# Altium PCB Lab1_PowerSupply.PcbDoc
Units mil, origin at the board's own origin, x right, y up, seen from the top; angles counter-clockwise.
Board outline 1150 x 1000 mil, 4 copper layers (Component Side, Ground Plane, Power Plane, Solder Side), stack 61.634 mil thick; 36 components, 23 nets, 106 pads, 171 vias.
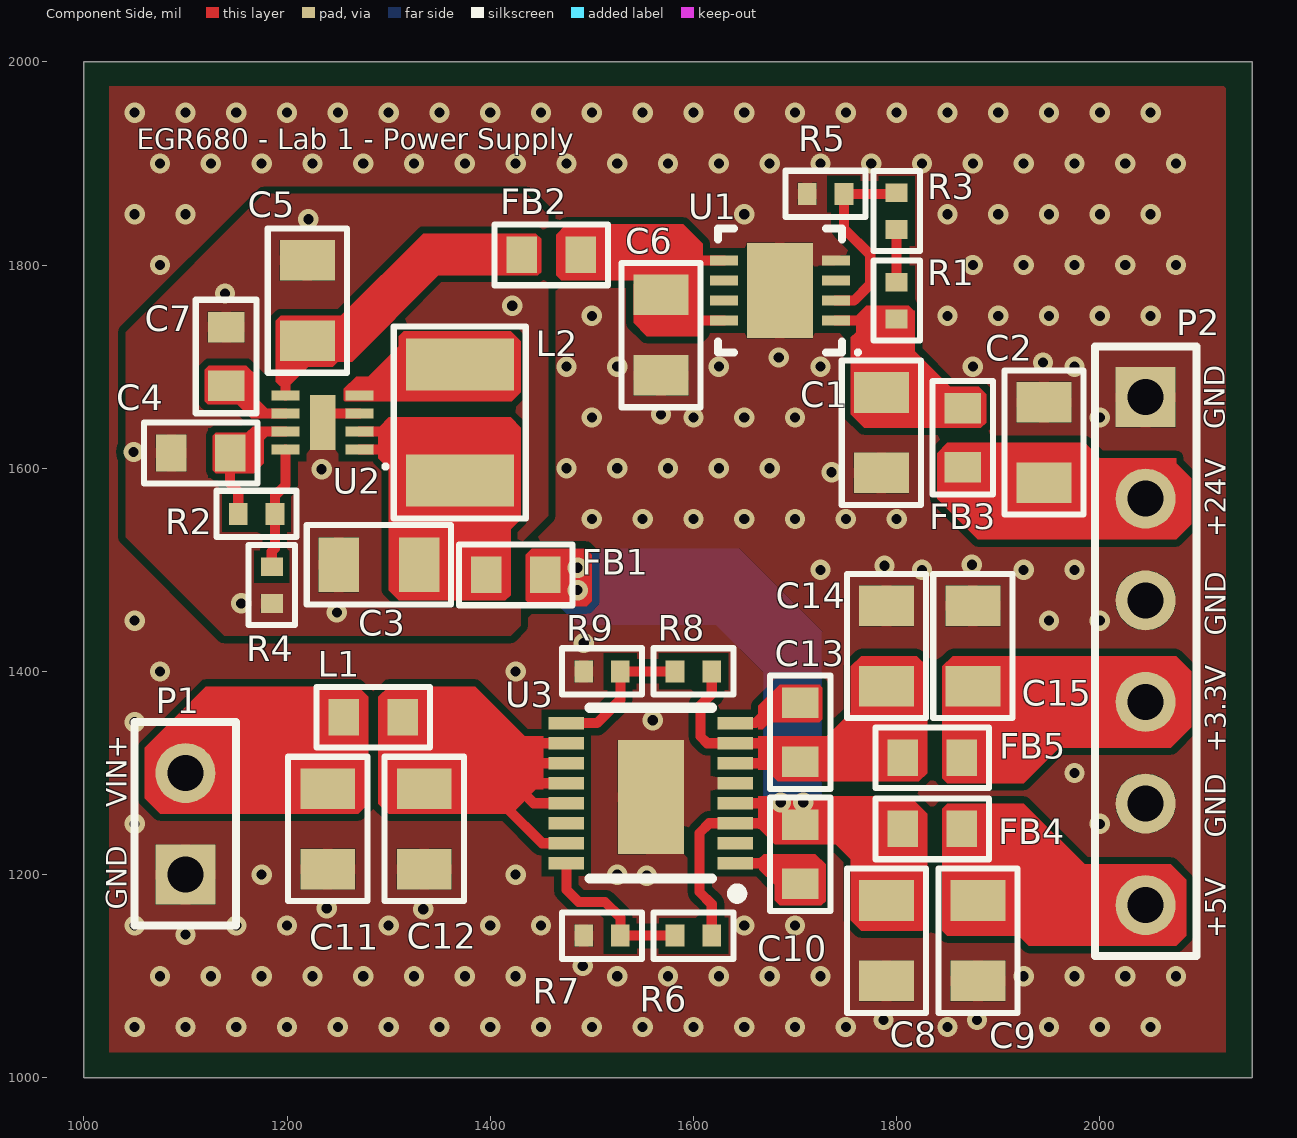
[diagram p0: Component Side view]
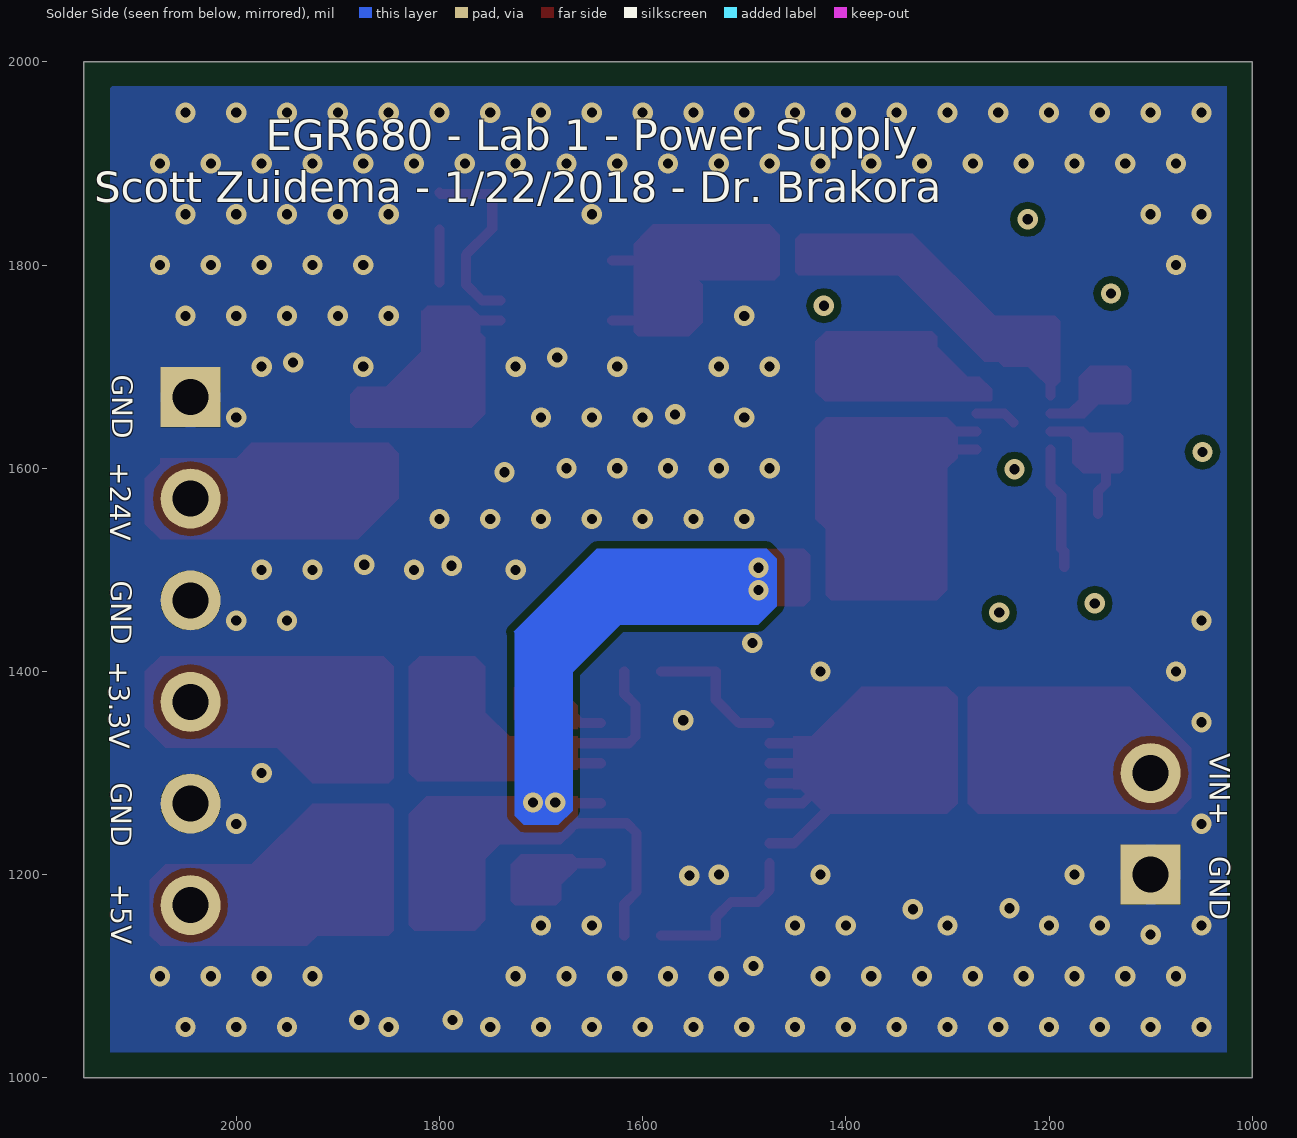
[diagram p1: Solder Side view, seen from below]
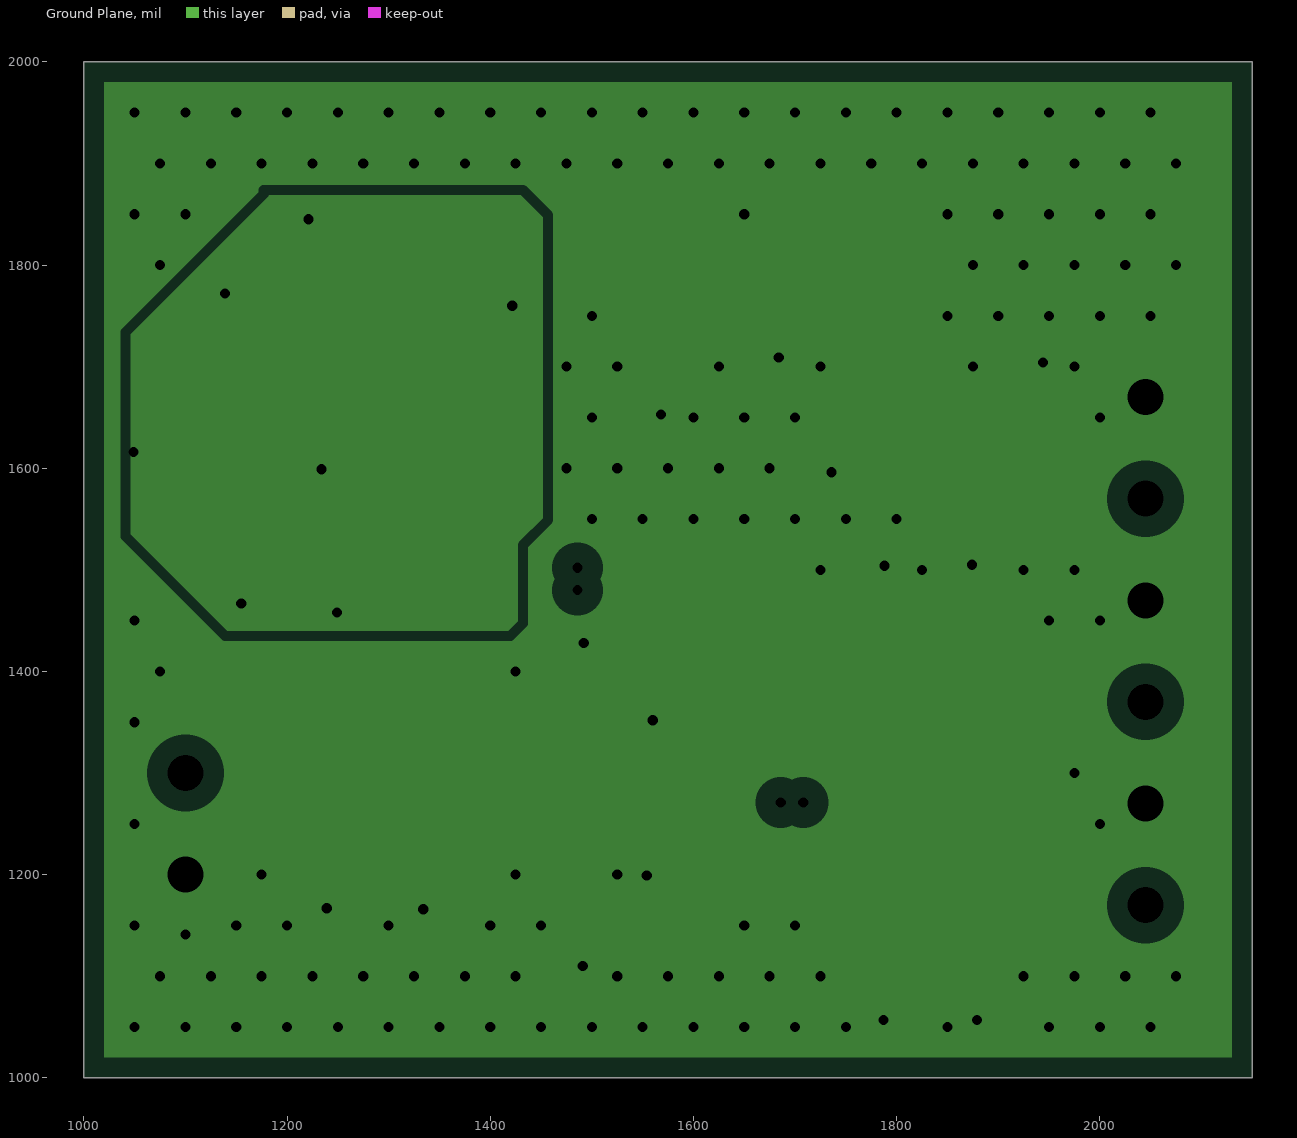
[diagram p2: Ground Plane, clearances drawn from the general rule]
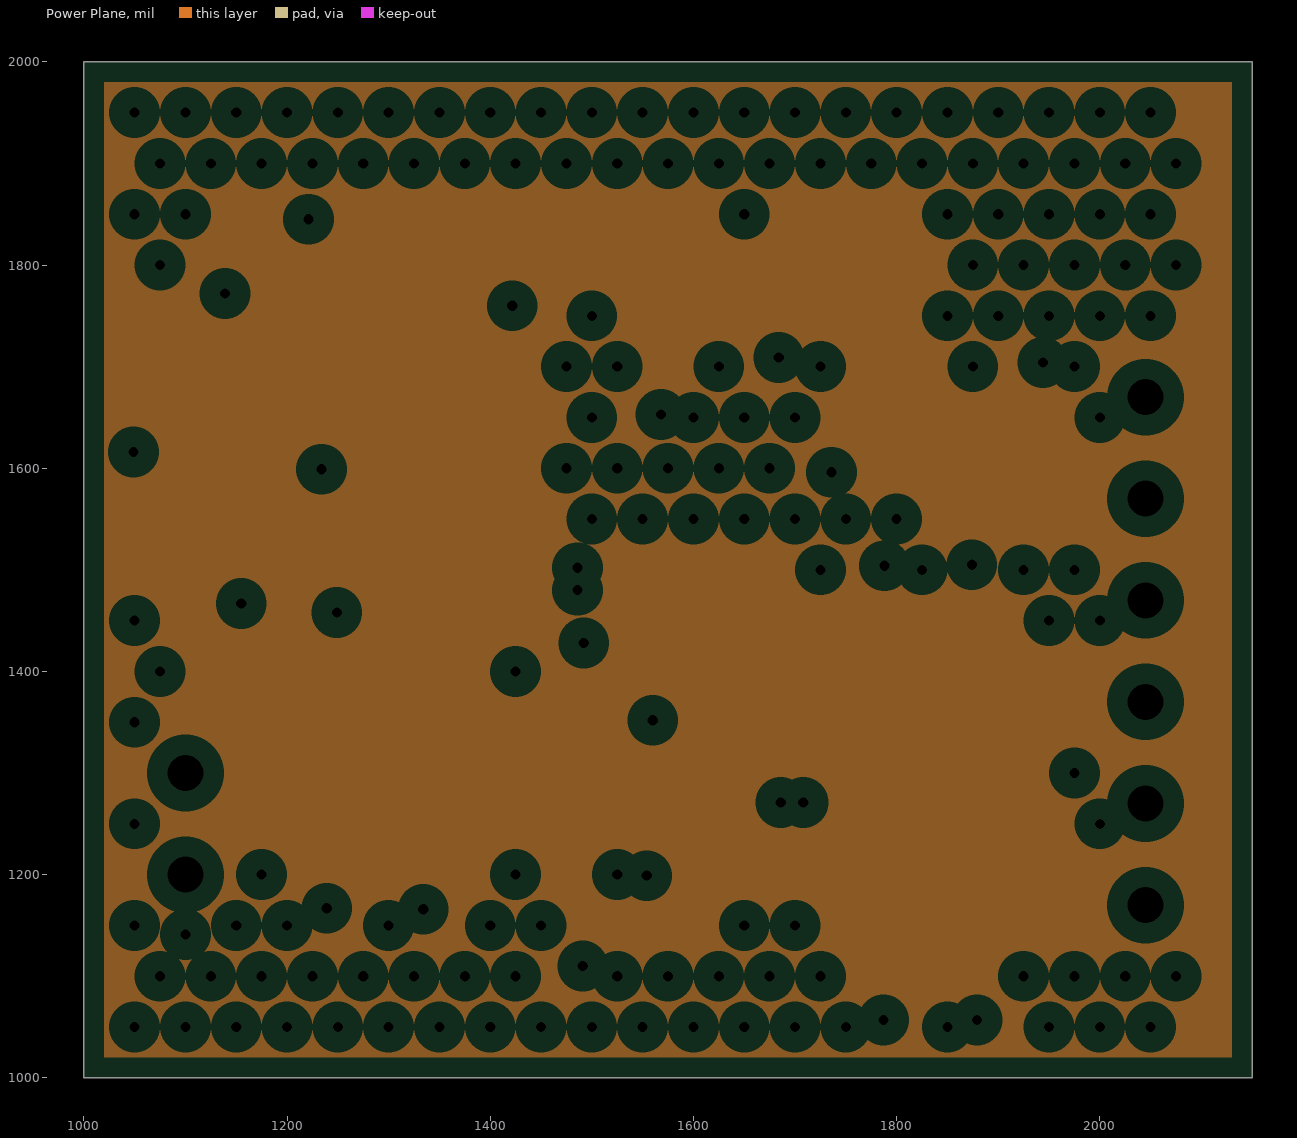
[diagram p3: Power Plane, clearances drawn from the general rule]
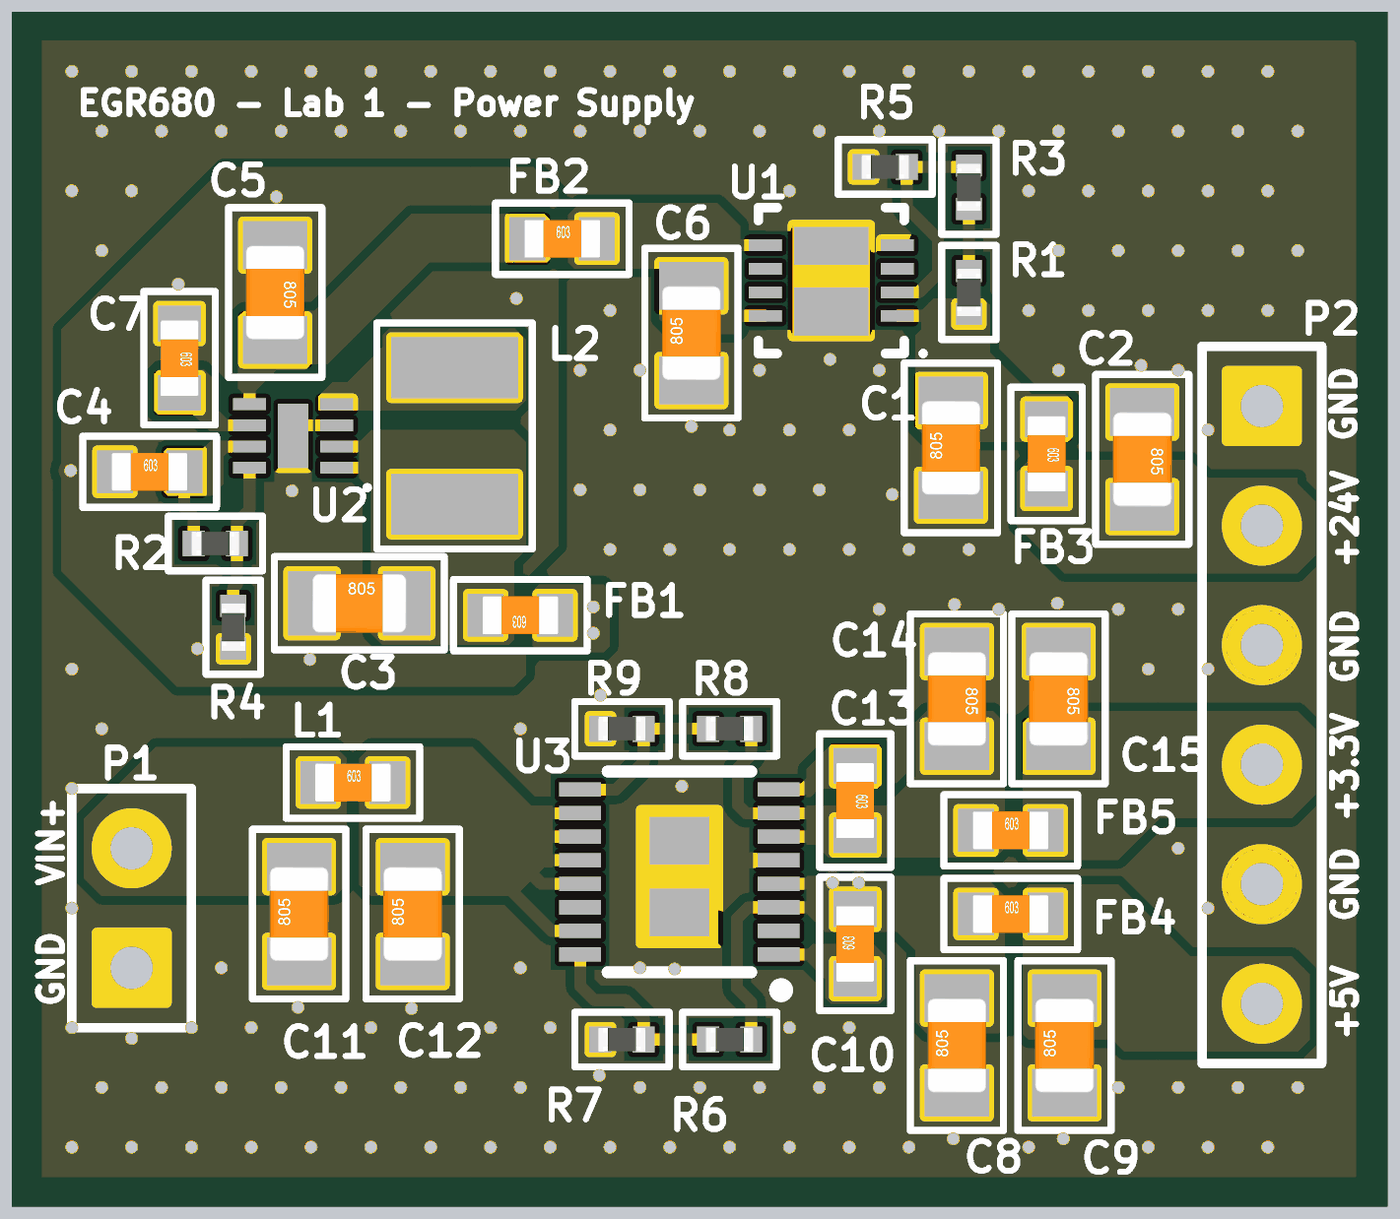
[diagram p4: 3D render of the assembled board from above, using the file's embedded part models]

## Layer stack, top to bottom
Top Solder: solder mask 0.4, Solder Resist, Dk 3.5
Component Side: signal copper 1.4
Dielectric 1: core 8, FR-4, Dk 4.8
Ground Plane: plane copper 1.417, net GND
Dielectric 3: prepreg 40, Dk 4.2
Power Plane: plane copper 1.417
Dielectric 4: core 8, Dk 4.2
Solder Side: signal copper 1.4
Bottom Solder: solder mask 0.4, Solder Resist, Dk 3.5

## Board outline
1000,1000 1000,2000 2150,2000 2150,1000

## Design rules (kind name [scope] priority, off if disabled: settings)
Clearance [All] p1: gap=7 ignorepadtopadclearanceinfootprint=FALSE except(0: Arc-Hole Track-Hole SMDPad-Hole THPad-Hole Via-Hole Fill-Hole Poly-Hole Region-Hole Text-Hole)
ComponentClearance [All] p1: gap=5 collisioncheckmode=3 verticalgap=10 showdistances=FALSE
HoleSize [All] p1: absolutevalues=TRUE maxlimit=500 minlimit=0 maxpercent=80.000 minpercent=20.000
MinimumSolderMaskSliver [All] p1: minsoldermaskwidth=0
PlaneClearance [All] p1: clearance=20
PlaneConnect [All] p1: planeconnectstyle=Direct reliefexpansion=20 reliefentries=4 reliefconductorwidth=10 reliefairgap=10
PolygonConnect [isvia] p1: connectstyle=Direct reliefconductorwidth=10 reliefentries=4 polygonreliefangle="90 Angle" airgapwidth=10
RoutingVias [All] p1: holewidth=10 width=20 viastyle="Through Hole" minholewidth=10 minwidth=20 maxholewidth=500 maxwidth=500
SilkToSilkClearance [All] p1: silktosilkclearance=0
SilkToSolderMaskClearance [IsPad] p1: minsilkscreentomaskgap=5 clearancetoexposedcopper=TRUE
SolderMaskExpansion [All] p1: expansion=4
Width [All] p1: maxlimit=10 minlimit=6 preferedwidth=10 minimp=50.000000 maximp=50.000000 favimp=50.000000
23 further rules are at their usual default settings.

## Components (designator, comment, footprint, x,y, rotation, side; value= is the part's Value field where it differs from the comment)
C1 "C0805" 0805CAP 1785,1635 r90 top value=1uF
C2 "C0805" 0805CAP 1945,1625.4 r270 top value=1uF
C3 "C0805" 0805CAP 1290.4,1505 r0 top value=1uF
C4 "C0603" 0603CAP 1115,1615 r0 top value=0.1uF
C5 "C0805" 0805CAP 1220,1765 r270 top value=1uF
C6 "C0805" 0805CAP 1568,1731 r90 top value=1uF
C7 "C0603" 0603CAP 1140,1710 r270 top value=0.1uF
C8 "C0805" 0805CAP 1790,1135 r90 top value=10uF
C9 "C0805" 0805CAP 1880,1135 r90 top value=10uF
C10 "C0603" 0603CAP 1705,1220 r90 top value=0.01uF
C11 "C0805" 0805CAP 1240,1245 r90 top value=10uF
C12 "C0805" 0805CAP 1335,1245 r90 top value=10uF
C13 "C0603" 0603CAP 1705,1340 r270 top value=0.01uF
C14 "C0805" 0805CAP 1790,1425 r270 top value=10uF
C15 "C0805" 0805CAP 1875,1425 r270 top value=10uF
FB1 "FB0603" 0603CAP 1425,1495 r180 top
FB2 "FB0603" 0603CAP 1460,1810 r0 top
FB3 "FB0603" 0603CAP 1865,1630 r270 top
FB4 "FB0603" 0603CAP 1835,1245 r0 top
FB5 "FB0603" 0603CAP 1835,1315 r0 top
L1 "FB0603" 0603CAP 1285,1355 r0 top
L2 "L1210" 1210RES 1370,1645 r90 top value=0.01mH
P1 "Header 2" HDR1X2 1100,1200 r90 top
P2 "Header 6" HDR1X6 2045,1670 r270 top
R1 "R0402" 0402RES 1800,1765 r270 top value=1.0k
R2 "R0402" 0402RES 1170,1555 r180 top value=1.0k
R3 "R0402" 0402RES 1800,1853.05 r270 top value=1.0k
R4 "R0402" 0402RES 1185,1485 r90 top value=1.0k
R5 "R0402" 0402RES 1730,1870 r0 top value=1.0k
R6 "R0402" 0402RES 1600,1140 r0 top value=680K
R7 "R0402" 0402RES 1510,1140 r0 top value=220K
R8 "R0402" 0402RES 1600,1400 r0 top value=330K
R9 "R0402" 0402RES 1510,1400 r0 top value=220K
U1 "LT3014EDD#PBF" LT-DD-8_V 1685,1775 r180 top
U2 "LT8410EDC#TRMPBF" LT-DC8_V 1235,1645 r180 top
U3 "LDO" MSE16 1558,1276.3 r180 top

## Footprints (in the part's own frame and the unit in brackets; to place one, negate y for a bottom-side part, rotate by r counter-clockwise, add the part's x,y. Pads: shape width x height; smd on the part's side, far side on the other; paste and mask are expansions set on the pad)
0402RES [mm] "Chip Resistor; Body 1.0 x 0.5 mm (LxW typ)"
  rect 0.47x0.549 smd: 1(-0.458,0) 2(0.458,0)
  silkscreen extent -1,-0.58 1,0.58, body extent -1,-0.58 1,0.58, height 0.27
0603CAP [mil] "Chip Capacitor; Body 1.6 x 0.8 mm (LxW typ)"
  rect 30x35.98 smd: 1(-29,0) 2(29,0)
  silkscreen extent -56,-30 56,30, body extent -56,-30 56,30, height 12
0805CAP [mil] "Chip Capacitor; Body 2.0 x 1.2 mm (LxW typ)"
  rect 40x54 smd: 1(-39.6,0) 2(39.6,0)
  silkscreen extent -71,-39 71,39, body extent -71,-39 71,39, height 31
1210RES [mm] "Chip Capacitor; Body 3.2 x 2.5 mm (LxW typ)"
  rect 1.3x2.7 smd: 1(-1.45,0) 2(1.45,0)
  silkscreen extent -2.4,-1.65 2.4,1.65, body extent -1.52,-1.27 1.52,1.27, height 2.2
HDR1X2 [mm] "Connector; Header; 2 Position"
  rect 1.5x1.5 hole 0.9: 1(0,0)
  round 1.5 hole 0.9: 2(2.54,0)
  silkscreen extent -1.27,-1.27 3.81,1.27
HDR1X6 [mm] "Connector; Header; 6 Position"
  rect 1.5x1.5 hole 0.9: 1(0,0)
  round 1.5 hole 0.9: 2(2.54,0) 3(5.08,0) 4(7.62,0) 5(10.16,0) 6(12.7,0)
  silkscreen extent -1.27,-1.27 13.97,1.27
LT-DC8_V [mm] "SON, 8-Leads, Body 2x2mm, Pitch 0.45mm, Thermal Pad 1.37x0.64mm, Recommended"
  rect 0.7x0.25 smd: 1(-0.925,0.675)
  rect 0.7x0.25 smd mask+0.102: 2(-0.925,0.225) 3(-0.925,-0.225) 4(-0.925,-0.675) 5(0.925,-0.675) 6(0.925,-0.225) 7(0.925,0.225) 8(0.925,0.675)
  rect 0.64x1.37 smd mask+0.102: 9(0,0)
  silkscreen extent -1.62,1.05 -1.52,1.15, body extent -1,-1 1,1, height 0.8
LT-DD-8_V [mm] "SON, 8-Leads, Body 3x3mm, Pitch 0.5mm, Thermal Pad 1.65x2.38 mm, IPC Low Density"
  rect 0.7x0.25 smd mask+0.102: 1(-1.4,0.75) 2(-1.4,0.25) 3(-1.4,-0.25) 4(-1.4,-0.75) 5(1.4,-0.75) 6(1.4,-0.25) 7(1.4,0.25) 8(1.4,0.75)
  rect 1.65x2.38 smd paste-1.27 mask+0.102: 9(0,0)
  silkscreen extent -2,-1.55 1.55,1.6, body extent -1.5,-1.5 1.5,1.5, height 0.8
MSE16 [mil] "Footprint for the LT3029MSE"
  rect 35x12 smd: 1(-83,65.1) 2(-83,45.4) 3(-83,25.7) 4(-83,6) 5(-83,-13.7) 6(-83,-33.4) 7(-83,-53.1) 8(-83,-72.8) 9(83,-72.8) 9(83,-72.8) 10(83,-53.1) 11(83,-33.4) 12(83,-13.7) 13(83,6) 14(83,25.7) 15(83,45.4) 16(83,65.1)
  rect 65x112 smd paste-50: 17(0,0)
  silkscreen extent -90,-88 60,100, body extent -61,-85 61,77, height 43

## Part data
C1 C2 C3 C5 C6 C8 C9 C11 C12 C14 C15: "0805 Ceramic Chip Capacitor - Standard"
C4 C7 C10 C13: "0603 Ceramic Chip Capacitor - Standard"
FB1 FB2 FB3 FB4 FB5 L1: "0603 Multilayer Ferrite Power Bead", Manufacturer="KOA Speer", Manufacturer P/N=CZP1JFTTD121P, Resistance @ 100MHz=120, Price=0.15, Vendor=Mouser, Vendor P/N=660-CZP1JFTTD121P
L2: "1210 Chip Inductor - Standard"
P1: "Header, 2-Pin", LatestRevisionDate=17-Jul-2002, LatestRevisionNote="Re-released for DXP Platform.", Publisher="Altium Limited"
P2: "Header, 6-Pin", LatestRevisionDate=17-Jul-2002, LatestRevisionNote="Re-released for DXP Platform.", Publisher="Altium Limited"
R1 R2 R3 R4 R5 R6 R7 R8 R9: "0402 Chip Resistor - Standard"
U1: "20 mA, Low Dropout Micropower Linear Regulator, 3 to 80 V Vin, Adjustable Vout, 8-pin SON (DD-8), -40 to 125 degC, Pb-Free", Dropout Voltage(V)=0.35, Manufacturer="Linear Technology", Output Voltage=Adj, Shutdown Current(uA)=1, Supplier Part Number 1=LT3014EDD#PBF-ND, Code_JEDEC=MO-229, ComponentLink1Description="Manufacturer URL", ComponentLink1URL=http://www.linear.com/, ComponentLink2Description=Datasheet, ComponentLink2URL=http://cds.linear.com/docs/en/datasheet/3014fd.pdf, ComponentLink3Description="Package Specification", ComponentLink3URL=http://cds.linear.com/docs/en/packaging/DFN_8_05-08-1698.pdf, DatasheetVersion="Rev. D", Discrete Pass Element=no, Iout(mA)=20, Isupply(mA)=0.007, Mounting Technology="Surface Mount", Noise(uV)=115, Number of Outputs=1, PackageDescription="8-Pin Plastic DFN, Body 3 x 3 mm, Pitch 0.5 mm", PackageReference=DD-8, PackageVersion=Jun-10, PartNumber=LT3014EDD#PBF, PSRR(dB)=70, RoHS=TRUE, Supplier 1=Digi-Key, Supplier 2=Farnell, Supplier 3=Newark, Supplier Part Number 2=1663546, Supplier Part Number 3=57M7903, Vin Max(V)=80, Vin Min(V)=3, Vout Max(V)=60, Vout Min(V)=1.22
U2: "Ultralow Power Boost Converter with Output Disconnect, 8-pin SON (DC8), -40 to 125 degC, Pb-Free, Mini Tape and Reel", Manufacturer="Linear Technology", Supplier Part Number 1=LT8410EDC#TRMPBFTR-ND, ComponentLink1Description="Manufacturer URL", ComponentLink1URL=http://www.linear.com/, ComponentLink2Description=Datasheet, ComponentLink2URL=http://cds.linear.com/docs/en/datasheet/84101fb.pdf, ComponentLink3Description="Package Specification", ComponentLink3URL=http://cds.linear.com/docs/en/packaging/DFN_8_05-08-1719.pdf, DatasheetVersion="Rev. B", Mounting Technology="Surface Mount", Number of Outputs=1, PackageDescription="8-Pin Plastic DFN, Body 2 x 2 mm, Pitch 0.45 mm", PackageReference=DC8, PackageVersion="Rev. A, 04/2009", Packing="Mini Tape and Reel", PartNumber=LT8410EDC#TRMPBF, RoHS=TRUE, Supplier 1=Digi-Key, Supplier 2=Digi-Key, Supplier 3=Digi-Key, Supplier 4=Newark, Supplier Part Number 2=LT8410EDC#TRMPBFCT-ND, Supplier Part Number 3=LT8410EDC#TRMPBFDKR-ND, Supplier Part Number 4=19P1078
U3: library part LT3029MSE, "Dual 500mA/500mA, Low Dropout, Low Noise, Micropower Linear Regulator", Manufacturer="Linear Technologies", Manufacturer P/N=LT3029EMSE#PBF, ComponentLink1Description=Datasheet, ComponentLink1URL=W:\EGR680\AltiumCustomLibraries\LinearTechnologies\Datasheets\3029fb.pdf, Price=3.55980, Vendor=Digikey, Vendor P/N=LT3029EMSE#PBF-ND

## Via types
v1: diameter 20, hole 10, Component Side to Solder Side, tented both sides, 171 vias

## Nets (pads, with @x,y where several pads share a name; then routed paths per layer and width w, separated by ;. In a path a pad name is that pad's centre, name@x,y a point inside that pad or via, vN(x,y) a via of type N, cw(c..) or ccw(c..) an arc to the next point about the centre after c; other vN are vias at no path point)
+3.3V: C15.2 FB5.2 P2.4
+5V: C9.2 FB4.2 P2.6
+24V: C2.2 FB3.2 P2.2
GND: C1.1 C2.1 C6.1 C8.1 C9.1 C11.1 C12.1 C14.1 C15.1 P1.1 P2.1 P2.3 P2.5 R5.1 R7.1 R9.1 U1.4 U1.9 U3.5 U3.17
  other v1: 1050,1050 1100,1050 1150,1050 1200,1050 1250,1050 1300,1050 1350,1050 1400,1050 1450,1050 1500,1050 1550,1050 1600,1050 1650,1050 1700,1050 1750,1050 1850,1050 1950,1050 2000,1050 2050,1050 1787,1057 1879,1057 1075,1100 1125,1100 1175,1100 1225,1100 1275,1100 1325,1100 1375,1100 1425,1100 1525,1100 1575,1100 1625,1100 1675,1100 1725,1100 1925,1100 1975,1100 2025,1100 2075,1100 1491,1110 1100,1141 1050,1150 1150,1150 1200,1150 1300,1150 1400,1150 1450,1150 1650,1150 1700,1150 1334,1166 1239,1167 1554,1199 1175,1200 1425,1200 1525,1200 1050,1250 2000,1250 1975,1300 1050,1350 1560,1352 1075,1400 1425,1400 1492,1428 1050,1450 1950,1450 2000,1450 1725,1500 1825,1500 1925,1500 1975,1500 1788,1504 1874,1505 1500,1550 1550,1550 1600,1550 1650,1550 1700,1550 1750,1550 1800,1550 1736,1596 1475,1600 1525,1600 1575,1600 1625,1600 1675,1600 1500,1650 1600,1650 1650,1650 1700,1650 2000,1650 1568,1653 1475,1700 1525,1700 1625,1700 1725,1700 1875,1700 1975,1700 1944,1704 1684,1709 1500,1750 1850,1750 1900,1750 1950,1750 2000,1750 2050,1750 1075,1800 1875,1800 1925,1800 1975,1800 2025,1800 2075,1800 1050,1850 1100,1850 1650,1850 1850,1850 1900,1850 1950,1850 2000,1850 2050,1850 1075,1900 1125,1900 1175,1900 1225,1900 1275,1900 1325,1900 1375,1900 1425,1900 1475,1900 1525,1900 1575,1900 1625,1900 1675,1900 1725,1900 1775,1900 1825,1900 1875,1900 1925,1900 1975,1900 2025,1900 2075,1900 1050,1950 1100,1950 1150,1950 1200,1950 1250,1950 1300,1950 1350,1950 1400,1950 1450,1950 1500,1950 1550,1950 1600,1950 1650,1950 1700,1950 1750,1950 1800,1950 1850,1950 1900,1950 1950,1950 2000,1950 2050,1950
LT8410_GND: C3.1 C4.1 C5.1 C7.1 R4.1 U2.3 U2.9 | length 40.1
  Component Side w10: U2.9 1243.86,1653.86 U2.3
  other v1: 1249,1458 1155,1467 1234,1599 1049,1616 1421.67,1760 1139,1772 1221,1845
NetC1_2: C1.2 FB3.1 R1.2 U1.1 | length 29.4
  Component Side w10: U1.1 1769.53,1745.47
NetC3_2: C3.2 FB1.2 L2.1 U2.1 U2.2 | length 50.4
  Component Side w10: U2.1 1296.43,1618.43 ; U2.2 1296.86,1636.14
NetC4_2: C4.2 R2.2 U2.7 | length 88
  Component Side w10: C4.2 1144,1585 1151.95,1577.05 R2.2 ; 1173.86,1636.14 U2.7
NetC5_2: C5.2 FB2.1 U2.5 | length 10
  Component Side w10: U2.5 1198.58,1681.58
NetC6_2: C6.2 FB2.2 U1.5 U1.8 | length 55.8
  Component Side w10: 1601.47,1745.47 U1.8 ; 1602.53,1804.53 U1.5
NetC7_2: C7.2 U2.6 | length 25.2
  Component Side w10: 1173.36,1653.86 U2.6
NetC8_2: C8.2 C10.2 FB1.1 FB4.1 R6.2 U3.3 U3.4 | length 217.2
  Component Side w10: R6.2 1618.05,1170.95 1606,1183 1606,1241 1615.6,1250.6 U3.3 1673.4,1250.6 1675,1249 ; U3.4 1676.7,1270.3 v1@1678,1269
  other v1: 1686,1271 1708,1271 1486,1480 1486,1502
NetC10_1: C10.1 U3.1 | length 45.7
  Component Side w10: U3.1 1680.8,1211.2 1685,1207
NetC11_2: C11.2 L1.1 P1.2
NetC12_2: C12.2 L1.2 U3.10 U3.11 U3.12 U3.13 U3.15 | length 213.7
  Component Side w10: 1416,1266 1451.1,1230.9 U3.15 ; 1428,1285 1442.7,1270.3 U3.13 ; 1442,1290 U3.12 ; 1446.3,1309.7 U3.11 ; 1449.6,1329.4 U3.10
NetC13_1: C13.1 U3.8 | length 35.5
  Component Side w10: U3.8 1661.1,1349.1 1672,1360
NetC13_2: C13.2 C14.2 FB5.1 R8.2 U3.6 U3.7 | length 168.8
  Component Side w10: R8.2 1618.05,1378.05 1607,1367 1607,1336 1613.6,1329.4 U3.7 1672.6,1329.4 1673,1329 ; U3.6 1671.3,1309.7 1672,1309
NetL2_2: L2.2 U2.4
NetR1_1: R1.1 R3.2 | length 52
  Component Side w10: R1.1 R3.2
NetR2_1: R2.1 R4.2 U2.8 | length 121
  Component Side w10: R4.2 1185,1518 1188,1521 R2.1 R2.1 1188.05,1573.05 1198.58,1583.58 U2.8
NetR3_1: R3.1 R5.2 U1.2 | length 192.6
  Component Side w10: U1.2 1758.16,1765.16 1774,1781 1774,1810 1748.05,1835.95 R5.2 1798.9,1870 R3.1
NetR6_1: R6.1 R7.2 U3.16 | length 162.3
  Component Side w10: U3.16 1475,1185 1487,1173 1513,1173 1528.05,1157.95 R7.2 R6.1
NetR8_1: R8.1 R9.2 U3.9 | length 144.4
  Component Side w10: U3.9@1475,1349.1 1505.1,1349.1 1528.05,1372.05 R9.2 R8.1
pads on no net: U1.3 U1.6 U1.7 U3.2 U3.14

## Polygon pours and split planes (outlines as drawn)
LT8410_GND on Component Side "LT8410_GND_L01_P000" (solid, pour order 0): 1420,1435 1430,1445 1430,1524 1429,1525 1457,1553 1457,1849 1436,1870 1177,1870 1041,1734 1041,1532 1138,1435
GND on Component Side "GND" (solid, pour order 1): 1025,1025 2124,1025 2124,1974 2122,1976 1025,1976
GND on Solder Side "GND Bottom" (solid, pour order 2): 1025,1025 2124,1025 2124,1974 2122,1976 1025,1976
LT8410_GND on Ground Plane (split plane): 1451.9,1846.89 1451.9,1551.11 1428.53,1527.74 1427.43,1526.09 1427.04,1524.14 1427.04,1449.25 1417.89,1440.1 1141.11,1440.1 1046.1,1535.11 1046.1,1731.89 1180.6,1866.4 1181.71,1868.05 1181.88,1868.9 1429.89,1868.9
GND on Ground Plane (split plane): 2129.9,1020.1 1020.1,1020.1 1020.1,1979.9 2129.9,1979.9
no net on Power Plane (split plane): 2129.9,1020.1 1020.1,1020.1 1020.1,1979.9 2129.9,1979.9

## Other copper
Component Side:
  region net NetC8_2: 1435,1515 1441,1521 1494,1521 1500,1515 1500,1469 1495,1464 1441,1464 1435,1470
  region net NetC5_2: 1250,1705 1264,1705 1349,1790 1447,1790 1450,1793 1450,1826 1445,1831 1334,1831 1253,1750 1245,1750 1245,1710
  region net NetC1_2: 1755,1710 1755,1653 1768,1640 1883,1640 1888,1645 1888,1673 1881,1680 1853,1680 1818,1715 1818,1755 1817,1755 1812,1760 1770,1760 1760,1750 1760,1734 1755,1729
  region net NetC6_2: 1595,1835 1609,1821 1609,1734 1605,1730 1554,1730 1541,1743 1541,1781
  region net NetC6_2: 1465,1830 1475,1840 1590,1840 1595,1835 1595,1790 1590,1785 1470,1785 1465,1790
  region net NetC5_2: 1189,1692 1189,1685 1193,1681 1202,1681 1213,1692
  region net NetC5_2: 1213,1692 1221,1700 1245,1700 1250,1705 1250,1745 1245,1750 1194,1750 1189,1745 1189,1700 1189,1692
  region net NetC7_2: 1180,1649 1165,1649 1151,1663 1122,1663 1119,1666 1119,1697 1123,1701 1160,1701 1171,1690 1171,1668 1180,1659
  region net NetC4_2: 1130,1595 1127,1598 1127,1632 1130,1635 1160,1635 1166,1641 1180,1641 1180,1631 1177,1628 1177,1605 1167,1595
  region net NetL2_2: 1256,1667 1256,1678 1268,1690 1280,1690 1310,1720 1310,1730 1315,1735 1420,1735 1430,1725 1430,1675 1421,1666 1257,1666
  region net NetC3_2: 1310,1470 1300,1480 1300,1600 1290,1610 1290,1641 1291,1641 1300,1650 1420,1650 1430,1640 1430,1550 1420,1540 1420,1475 1415,1470
  region net NetC10_1: 1665,1205 1680,1190 1680,1175 1685,1170 1726,1170 1730,1174 1730,1210 1720,1220 1669,1220 1664,1215 1665,1214
  region net NetC13_1: 1664,1343 1664,1366 1685,1387 1725,1387 1725,1386 1727,1384 1727,1353 1724,1350 1675,1350 1668,1343
  region net NetC13_2: 1664,1303 1672,1303 1683,1292 1822,1292 1830,1300 1830,1405 1820,1415 1765,1415 1755,1405 1755,1360 1731,1336 1664,1336
  region net +24V: 1840,1615 1850,1625 1985,1625 2000,1610 2075,1610 2075,1605 2090,1590 2090,1545 2075,1530 1880,1530 1840,1570
  region net +3.3V: 1850,1290 1845,1295 1845,1405 1855,1415 2075,1415 2090,1400 2090,1345 2070,1325 1960,1325 1925,1290
  region net +5V: 1845,1265 1850,1270 1925,1270 1985,1210 2070,1210 2085,1195 2085,1140 2075,1130 1930,1130 1920,1140 1850,1140 1845,1145
  region net NetC8_2: 1664,1277 1813,1277 1830,1260 1830,1150 1825,1145 1765,1145 1755,1155 1755,1215 1740,1230 1680,1230 1670,1240 1665,1245 1664,1245
  region net NetC12_2: 1290,1375 1300,1385 1385,1385 1434,1336 1452,1336 1452,1284 1445,1284 1421,1260 1300,1260 1290,1270
  region net NetC11_2: 1075,1260 1270,1260 1280,1270 1280,1375 1270,1385 1120,1385 1060,1325 1060,1275
Solder Side:
  region net NetC8_2: 1468,1464 1468,1511 1478,1521 1645,1521 1727,1439 1726,1438 1726,1258 1717,1249 1683,1249 1669,1263 1669,1399 1622,1446 1486,1446
Ground Plane (plane layer: these items are gaps in the copper):
  lines w10: 1041,1533 1139,1435 1420,1435 1432.14,1447.14 1432.14,1524.14 1457,1549 1457,1849 1432,1874 1425.34,1874 1177,1874 1177,1870 1041,1734 1041,1533

## Silkscreen, mask and mechanical layers (free items; w line width, h text height)
Top Overlay:
  text "EGR680 - Lab 1 - Power Supply" at 1052,1914 h20
  text "GND" at 2123,1638.27 h20 r90
  text "+24V" at 2124,1532.27 h20 r90
  text "GND" at 2124,1435.27 h20 r90
  text "+3.3V" at 2124,1319.95 h20 r90
  text "VIN+" at 1042,1266.27 h20 r90
  text "GND" at 2124,1236.27 h20 r90
  text "GND" at 1042,1165.27 h20 r90
  text "+5V" at 2124,1137.27 h20 r90
Bottom Overlay:
  text "EGR680 - Lab 1 - Power Supply" at 1971,1913 h30
  text "Scott Zuidema - 1/22/2018 - Dr. Brakora" at 2140,1862 h30
  text "GND" at 2122,1692.27 h20 r90
  text "+24V" at 2124,1606 h20 r90
  text "GND" at 2123,1489.27 h20 r90
  text "+3.3V" at 2125,1410 h20 r90
  text "VIN+" at 1042,1319.27 h20 r90
  text "GND" at 2123,1290.27 h20 r90
  text "GND" at 1042,1218.27 h20 r90
  text "+5V" at 2123,1191.27 h20 r90
Mechanical 3:
  the board outline again, w4